# EAGLE board JD_Badge_V1.0 (EAGLE 9.1.3)
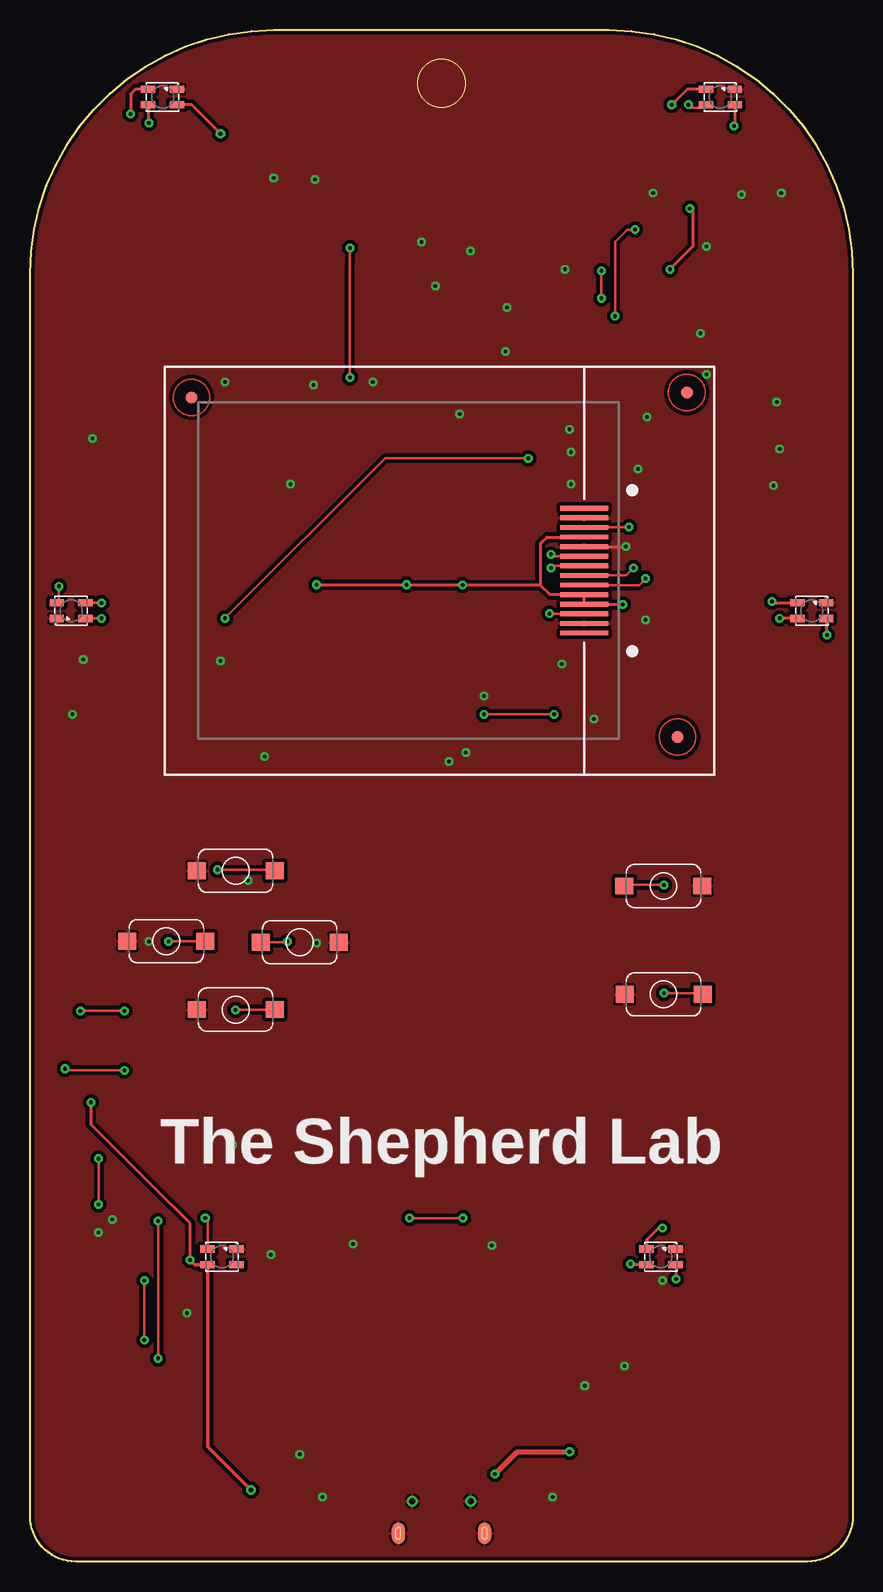
[diagram p0: board, top side]
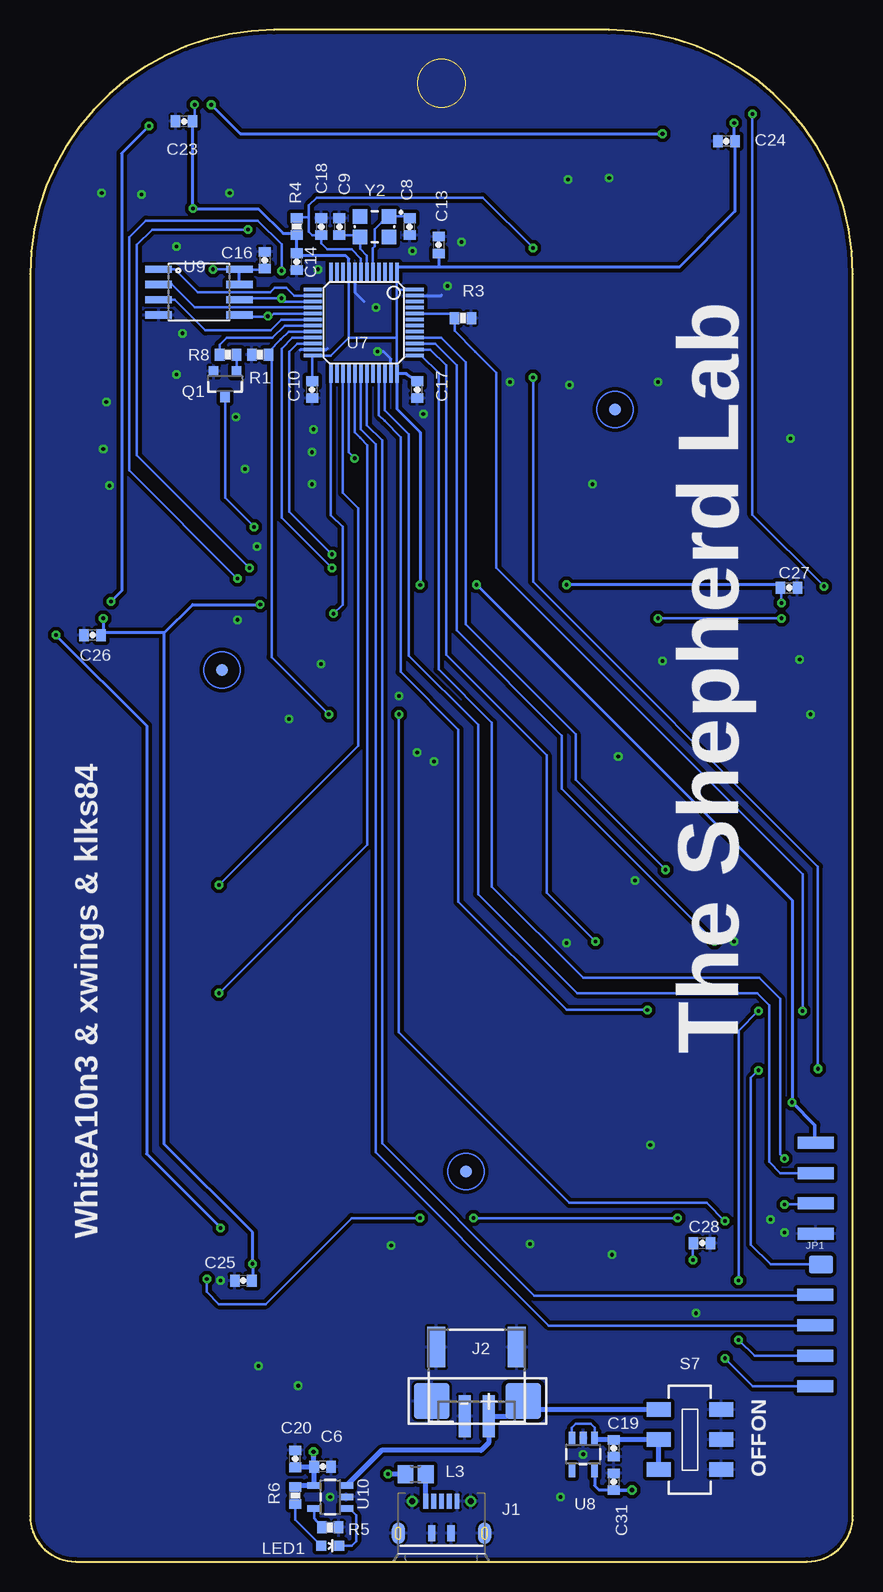
[diagram p1: board, bottom side, seen from below]

Size 68.58 x 127.64 mm. Coordinates in mm from the lower left corner, seen from the top.
Outline: 68.58,107.31 68.58,3.81 arc-90 64.77,0 3.81,0 arc-90 0,3.81 0,107.31 arc-90 20.32,127.64 48.26,127.64 arc-90 68.58,107.31
Copper layers (1*16): Top 0.035mm / dielectric 1.5mm / Bottom 0.035mm
Design rules "yun": minimum track width 6mil, minimum drill 12mil, track to track 6mil, track to pad 6mil, pad to pad 6mil, via to via 6mil, smd to smd 6mil, copper to edge 10mil, drill to drill 6mil, minimum pad ring 8mil, minimum via ring 8mil, stop-mask expansion 4mil, vias tented up to drill 20mil, thermal gap 8mil
Net classes: 0 default: width 0.203 mm, clearance 0.203 mm; 1 3.3V: width 0.254 mm
Milling: area 32.3,121.2 to 36.3,125.2

## Footprints (pad centres in the part's own frame; a part is rotated, then mirrored left to right if it is on the bottom)
BATTERY-LIPO2 = smd 3 x 3: + -3.81,0; - 3.81,0
0603-CAP = smd 0.8 x 1: 1 -0.7,0; 2 0.7,0
RGB_2427 = smd 1.2 x 0.6: 1 1.2,-0.65; 2 1.2,0.65; 3 -1.2,0.65; 4 -1.2,-0.65
USB-MICRO-4 = smd 0.4 x 1.25: DM- 0.65,-1.835; DP+ 0,-1.835; GND -1.3,-1.835; ID -0.65,-1.835; VBUS 1.3,-1.835 | smd 0.6 x 1.35: MT1 0.8,0.815; MT2 -0.8,0.815 | smd 1.1 x 1.8: MT5 3.6,0.815; MT6 -3.6,0.815 | smd 1.1 x 1.8 bottom: MT7 -3.6,0.815; MT8 3.6,0.815 | drill 0.5: MT9 -2.425,-1.86; MT10 2.425,-1.86
PH2.0_SMD_2 = smd 1 x 3.5: 1 -1,-4; 2 1,-4 | smd 1.5 x 3.4: G1 -3.35,1.75; G2 3.35,1.75
1X01_SMD_2X1.5 = smd 2 x 1.5: P$1 0,0
1X04_TEST_2 = smd 1 x 3: 1 -3.81,-0.08; 2 -1.27,-0.08; 3 1.27,-0.08; 4 3.81,-0.08
FB805 = smd 1.3 x 1.5: 1 -0.85,0; 2 0.85,0
LED-0603 = smd 0.8 x 0.8: A 0,-0.75; C 0,0.75
SOT23-3 = smd 0.8 x 0.9: 1 -0.95,-1; 2 0.95,-1; 3 0,1.1
0603-RES = smd 0.8 x 1: 1 -0.7,0; 2 0.7,0
BUTTON_TSSURX = smd 1.5 x 1.4: P$1 -3.25,0; P$2 3.25,0
MSS22D18 = smd 1.2 x 2: 1 -2.5,2.6; 2 0,2.6; 3 2.5,2.6; 4 -2.5,-2.6; 5 0,-2.6; 6 2.5,-2.6
FIDUCIA-MOUNT = smd 1.016 x 1.016: P$1 0,0
TQFP48 = smd 0.3 x 1.5: 1 -2.75,-4.25; 2 -2.25,-4.25; 3 -1.75,-4.25; 4 -1.25,-4.25; 5 -0.75,-4.25; 6 -0.25,-4.25; 7 0.25,-4.25; 8 0.75,-4.25; 9 1.25,-4.25; 10 1.75,-4.25; 11 2.25,-4.25; 12 2.75,-4.25; 25 2.75,4.25; 26 2.25,4.25; 27 1.75,4.25; 28 1.25,4.25; 29 0.75,4.25; 30 0.25,4.25; 31 -0.25,4.25; 32 -0.75,4.25; 33 -1.25,4.25; 34 -1.75,4.25; 35 -2.25,4.25; 36 -2.75,4.25 | smd 1.5 x 0.3: 13 4.25,-2.75; 14 4.25,-2.25; 15 4.25,-1.75; 16 4.25,-1.25; 17 4.25,-0.75; 18 4.25,-0.25; 19 4.25,0.25; 20 4.25,0.75; 21 4.25,1.25; 22 4.25,1.75; 23 4.25,2.25; 24 4.25,2.75; 37 -4.25,2.75; 38 -4.25,2.25; 39 -4.25,1.75; 40 -4.25,1.25; 41 -4.25,0.75; 42 -4.25,0.25; 43 -4.25,-0.25; 44 -4.25,-0.75; 45 -4.25,-1.25; 46 -4.25,-1.75; 47 -4.25,-2.25; 48 -4.25,-2.75
SOT23-5 = smd 1.1 x 0.55: 1 -1.35,0.95; 2 -1.35,0; 3 -1.35,-0.95; 4 1.35,-0.95; 5 1.35,0.95
SO08-EIAJ = smd 0.61 x 2.21: 1 -1.905,-3.378; 2 -0.635,-3.378; 3 0.635,-3.378; 4 1.905,-3.378; 5 1.905,3.353; 6 0.635,3.353; 7 -0.635,3.353; 8 -1.905,3.353
TFT_1.8_SMD = smd 0.4 x 4: 1 5.2,-14.63; 2 4.4,-14.63; 3 3.6,-14.63; 4 2.8,-14.63; 5 2,-14.63; 6 1.2,-14.63; 7 0.4,-14.63; 8 -0.4,-14.63; 9 -1.2,-14.63; 10 -2,-14.63; 11 -2.8,-14.63; 12 -3.6,-14.63; 13 -4.4,-14.63; 14 -5.2,-14.63
CRYSTAL-SMD-3225 = smd 1.2 x 1.2: 1 -1.2,-0.85; 2 1.2,-0.85; 3 1.2,0.85; 4 -1.2,0.85

## Placement (x,y rotation side)
BAT1  [BATTERY-LIPO2]  31.29,13.38 180 bottom
C6  1uF  [0603-CAP]  44.2,7.92 180 bottom
C8  22pF  [0603-CAP]  36.95,111.25 90 bottom
C9  22pF  [0603-CAP]  42.79,111.25 270 bottom
C10  1uF  [0603-CAP]  45.08,97.66 90 bottom
C13  0.1uF  [0603-CAP]  34.54,109.73 270 bottom
C14  0.1uF  [0603-CAP]  46.35,108.33 90 bottom
C16  0.1uF  [0603-CAP]  49.02,108.45 270 bottom
C17  0.1uF  [0603-CAP]  36.31,97.66 90 bottom
C18  0.1uF  [0603-CAP]  44.32,111.25 270 bottom
C19  1uF  [0603-CAP]  19.94,9.45 270 bottom
C20  0.1uF  [0603-CAP]  46.48,8.56 90 bottom
C23  0.1uF  [0603-CAP]  55.75,120.01 180 bottom
C24  0.1uF  [0603-CAP]  10.54,118.36 180 bottom
C25  0.1uF  [0603-CAP]  50.8,23.42 180 bottom
C26  0.1uF  [0603-CAP]  63.37,77.21 180 bottom
C27  0.1uF  [0603-CAP]  5.33,81.15 0 bottom
C28  0.1uF  [0603-CAP]  12.57,26.54 0 bottom
C31  0.1uF  [0603-CAP]  19.94,6.66 270 bottom
D1  XT1511-2427  [RGB_2427]  11.05,122.05 0 top
D2  XT1511-2427  [RGB_2427]  57.53,122.05 0 top
D3  XT1511-2427  [RGB_2427]  65.15,79.25 0 top
D4  XT1511-2427  [RGB_2427]  52.58,25.4 0 top
D5  XT1511-2427  [RGB_2427]  16,25.4 0 top
D6  XT1511-2427  [RGB_2427]  3.43,79.25 180 top
J1  USB_5_MICRO_4  [USB-MICRO-4]  34.29,3.18 180 bottom
J2  M02_G_PH2.0  [PH2.0_SMD_2]  31.37,16.13 0 bottom
JP1  M01_2X1.5MM  [1X01_SMD_2X1.5]  2.67,24.77 0 bottom
JP2  [1X04_TEST_2]  3.05,18.41 270 bottom
JP3  [1X04_TEST_2]  3.18,31.11 90 bottom
L3  1A  [FB805]  36.45,7.29 0 bottom
LED1  [LED-0603]  43.56,1.32 270 bottom
Q1  S8050  [SOT23-3]  52.32,98.18 180 bottom
R1  10k  [0603-RES]  49.4,100.58 180 bottom
R3  10k  [0603-RES]  32.51,103.63 180 bottom
R4  10k  [0603-RES]  46.35,111.25 270 bottom
R5  1.5k  [0603-RES]  43.56,2.85 180 bottom
R6  1k  [0603-RES]  46.48,5.51 90 bottom
R8  1k  [0603-RES]  52.07,100.58 180 bottom
S2  SWITCH_2_T  [BUTTON_TSSURX]  52.79,56.3 180 top
S3  SWITCH_2_T  [BUTTON_TSSURX]  22.47,51.61 180 top
S5  SWITCH_2_T  [BUTTON_TSSURX]  52.79,47.27 0 top
S6  SWITCH_2_T  [BUTTON_TSSURX]  11.36,51.7 0 top
S7  SWITCH-DPDT  [MSS22D18]  13.59,10.16 90 bottom
S8  SWITCH_2_T  [BUTTON_TSSURX]  17.13,57.57 0 top
S9  SWITCH_2_T  [BUTTON_TSSURX]  17.13,46 0 top
U1  FIDUCIALMOUNT  [FIDUCIA-MOUNT]  52.58,74.3 0 bottom
U2  FIDUCIALMOUNT  [FIDUCIA-MOUNT]  32.26,32.51 0 bottom
U3  FIDUCIALMOUNT  [FIDUCIA-MOUNT]  19.81,96.01 0 bottom
U5  FIDUCIALMOUNT  [FIDUCIA-MOUNT]  53.97,68.7 0 top
U6  FIDUCIALMOUNT  [FIDUCIA-MOUNT]  13.45,97.03 0 top
U7  STM32F103C8T6  [TQFP48]  40.76,103.25 180 bottom
U8  ME6212  [SOT23-5]  22.48,8.94 270 bottom
U9  W25Q32  [SO08-EIAJ]  54.48,105.79 270 bottom
U10  ME4074  [SOT23-5]  43.56,5.38 180 bottom
U11  TFT_1.8_SMD  [TFT_1.8_SMD]  31.56,82.58 90 top
U12  FIDUCIALMOUNT  [FIDUCIA-MOUNT]  54.73,97.41 0 top
U13  LOGO_HACKNOWN_14.4_13.2_Z  [LOGO_HACKNOWN_14.4_13.2_Z]  63.63,3.05 0 bottom
Y2  8MHz  [CRYSTAL-SMD-3225]  39.87,111.25 180 bottom

## Library data of the parts
BAT1 C6 C8-C10 C13 C14 C16-C20 C23-C28 C31 D1-D6 J1 J2 JP1-JP3 L3 LED1 R1 R3-R6 R8 S2 S3 S5 S6 S8 S9 U1-U3 U5-U13 Y2 = 2SparkFun
Q1 = 1SparkFun
S7 = 0SparkFun

## Nets
3.3V: C10.2 C13.2 C14.2 C16.2 C17.2 C23.1 C24.1 C25.1 C26.1 C27.1 C28.1 C31.2 D1.4 D2.4 D3.4 D4.4 D5.4 D6.4 JP3.4 R4.2 U7.1 U7.9 U7.24 U7.36 U7.48 U8.5 U9.7 U9.8 U11.4 U11.10 U11.11
5V: C6.2 C20.1 L3.1 R6.2 U10.4
11: U7.46
111: U7.13
113: U7.41
GND: BAT1.- C6.1 C8.1 C9.1 C10.1 C13.1 C14.1 C16.1 C17.1 C18.1 C19.2 C20.2 C23.2 C24.2 C25.2 C26.2 C27.2 C28.2 C31.1 D1.2 D2.2 D3.2 D4.2 D5.2 D6.2 J1.GND J1.MT1 J1.MT2 J1.MT5 J1.MT6 J1.MT7 J1.MT8 J1.MT9 J1.MT10 J2.1 J2.G1 J2.G2 JP3.1 Q1.2 R1.2 R3.1 R5.1 S2.P$1 S3.P$1 S5.P$1 S6.P$1 S7.4 S7.5 S7.6 S8.P$1 S9.P$1 U7.8 U7.23 U7.35 U7.47 U8.2 U9.4 U10.2 U11.2 U11.5 U11.13
I2C1_SCL: U7.42
I2C1_SDA: U7.43
KEY_A: U7.26
KEY_B: U7.32
KEY_C: S5.P$2 U7.29
KEY_D: S2.P$2 U7.27
KEY_DOWN: S9.P$2 U7.33
KEY_ESC: U7.12
KEY_LEFT: S6.P$2 U7.39
KEY_OK: U7.10
KEY_RIGHT: S3.P$2 U7.38
KEY_UP: S8.P$2 U7.40
LCD_A0: U7.21 U11.7
LCD_CS: U7.25 U11.12
LCD_RES: U7.22 U11.6
MISO: U7.16 U9.2
MOSI: U7.17 U9.5 U11.8
MOSI2: D6.3 U7.28
N$1: D3.1 D4.3
N$2: C8.2 U7.5 Y2.1
N$4: C9.2 U7.6 Y2.3
N$6: D4.1 D5.3
N$7: R5.2 U10.5
N$8: D5.1
N$9: Q1.3 U11.3
N$10: LED1.A R6.1
N$11: LED1.C U10.1
N$12: J1.VBUS L3.2
N$13: BAT1.+ J2.2 S7.3 U10.3
N$14: D1.3 D6.1
N$31: Q1.1 R8.1
N$53: D2.1 D3.3
N$65: D1.1 D2.3
RF: U7.45
RF_CS_2: U7.11
SCK: U7.15 U9.6 U11.9
STM32_BOOT0: JP2.3 R3.2 U7.44
STM32_BOOT1: JP2.4 R1.1 U7.20
STM32_RST: C18.2 JP1.P$1 R4.1 U7.7
STM32_RX: JP2.1 U7.31
STM32_TX: JP2.2 U7.30
SWCLK: JP3.2 U7.37
SWDIO: JP3.3 U7.34
TFT_BK: R8.2 U7.19
VBAT: C19.1 S7.1 S7.2 U8.1 U8.3
W25Q_CS: U7.14 U9.1
W25Q_WP: U7.18 U9.3

## Tracks (layer width: path | path; a pad name or v marks a point on that pad's centre or on a via)
3.3V  (via drill 0.3, 0.35)
  Top 0.203: D6.4 5.95,79.9 v5.96,79.88 | v54.86,121.41 55.11,121.16 56.09,121.16 D2.4 | 9.9,121.34 D1.4
  Top 0.254: 42.54,81.38 v36.06,81.38 31.34,81.38 v31.36,81.41 v23.87,81.41 | D3.4 62.49,78.6 v62.48,78.61 | v49.4,79.75 46.22,79.75 U11.11 U11.10 43.34,80.58 42.54,81.38 | v53.33,107.69 55.24,109.6 55.24,112.52 v54.98,112.77 | D4.4 50.1,24.75 v50.04,24.82 | v13.34,25.15 13.34,28.07 13.34,28.19 10.54,30.99 5.08,36.45 v5.08,38.28 | U11.4 43.08,85.38 42.54,84.83 42.54,81.38 | v9.9,119.89 9.9,121.34 9.9,121.35 D1.4
  Top 0.305: v18.41,5.97 15.05,9.34 | 15.05,9.34 14.99,9.4 | 15.05,9.34 14.8,9.58 D5.4 13.73,24.75 v13.34,25.15
  Bottom 0.203: 38.01,98.91 U7.36 38.01,101.98 | 38.01,101.98 38.01,106.04 | 38.01,106.04 38.01,107.31 U7.1 | U7.48 37.97,106 38.01,106.04 | 50.92,107.57 51,107.57 51.09,107.66 | v53.33,107.69 U9.8 51.09,107.66 | U7.9 42.01,102 | 42.01,102 43.51,100.5 U7.24 45.08,100.43 C10.2 | 38.01,101.98 42.01,101.98 42.01,102 | v5.96,79.88 5.96,81.09 C27.1 | v54.86,121.41 54.86,120.2 C23.1 | v13.34,25.15 13.34,26.48 C28.1 | 18.43,5.96 v18.41,5.97 | C16.2 49.11,107.66 51.09,107.66
  Bottom 0.254: U8.5 21.53,6.34 21.14,5.96 C31.2 | v31.36,81.41 27.49,77.54 5.08,55.12 v5.08,38.28 | C17.2 37.21,99 U7.36 38.01,96.05 36.06,94.11 v36.06,81.38 | U7.9 42.01,108.56 42.28,108.84 46.16,108.84 C14.2 | C14.2 46.67,109.03 | 54.8,112.71 54.92,112.71 v54.98,112.77 | 38.01,107.31 38.01,107.88 35.55,107.88 34.92,107.88 34.54,107.88 | C13.2 34.54,107.88 | v23.87,81.41 6.28,81.41 C27.1 | v62.48,78.61 62.48,77.4 C26.1 62.48,77.39 57.4,77.39 | C25.1 50.04,23.48 v50.04,24.82 50.04,27.44 57.4,34.8 57.4,77.39 | U9.7 U9.8 | v49.4,79.75 55.04,79.75 57.4,77.39 | C14.2 R4.2 46.48,110.68 47.49,110.68 49.52,112.71 54.8,112.71 | JP3.4 3.09,34.97 3.18,35.05 | v9.9,119.89 9.9,118.42 C24.1 9.84,112.51 14.47,107.88 34.54,107.88 | C23.1 55.05,112.96 54.8,112.71
  Bottom 0.305: 3.18,35.05 3.18,36.37 v5.08,38.28 | C31.2 18.43,5.96
5V  (via drill 0.3, 0.35)
  Top 0.406: v38.73,7.29 40.59,9.14 v44.96,9.14
  Bottom 0.305: 46.36,6.33 R6.2
  Bottom 0.406: L3.1 v38.73,7.29 | 46.36,6.33 U10.4 44.9,6.35 C6.2 | v44.96,9.14 44.96,7.99 C6.2 | C6.2 44.93,7.96 | C6.2 44.96,7.86 C20.1
GND  (via drill 0.3)
  Top 0.254: U11.5 v49.65,84.58
  Bottom 0.254: U7.47 34.32,105.5 34.28,105.53 | U7.8 41.51,105.78 40.76,105.03 | U7.35 38.51,100.24 39.11,100.84 v39.62,100.84 | 43.81,101.09 43.9,101 U7.23 46.06,101 46.09,100.96
  other vias: 22.48,8.94 43.56,5.38 46.23,14.66 44.95,94.36 35.81,95.63 45.08,92.45 39.74,104.52 56.38,109.6 44.57,107.69 52.7,23.42 13.08,20.7 6.86,28.5 16.89,34.72 19.56,67.11 38.48,26.34 49.53,16.31 33.77,106.3 55.87,102.36 56.38,98.93 51.43,95.38 62.22,96.64 62.48,92.71 61.97,89.66 32.63,109.98 36.7,109.22 20.31,115.31 23.74,115.19 23.61,98.04 16.25,98.3 28.57,98.3 5.2,93.6 15.87,75.06 4.44,75.18 21.71,89.79 44.32,74.8 50.67,91.06 45.08,89.79 51.3,78.48 46.98,70.23 36.31,67.44 34.92,66.67 37.84,72.13 3.55,70.61 24.38,5.38 62.6,114.04 59.3,113.92 51.94,114.04 5.71,27.43 26.92,26.47 20.07,25.58 18.16,56.77 23.88,51.56 9.91,51.69
  pour Top (isolate 0.305, rank 2): -2.01,-1.15 70.83,-1.15 70.83,127.79 -2.01,127.79
  pour Bottom (isolate 0.305, rank 2): -2.04,-1.15 70.96,-1.15 70.96,127.79 -2.13,127.79 -2.04,75.06
KEY_C  (via drill 0.3)
  Top 0.203: v52.83,47.37 55.95,47.37 S5.P$2
  Bottom 0.203: v52.83,47.37 40.45,59.74 40.45,93.05 41.07,93.66 41.51,94.1 U7.29
KEY_D  (via drill 0.3)
  Top 0.203: v52.83,56.39 49.62,56.39 S2.P$2
  Bottom 0.203: U7.27 42.51,89.06 41.24,87.8 41.24,67.97 v52.83,56.39
KEY_DOWN  (via drill 0.3)
  Top 0.203: S9.P$2 17.17,46 v17.14,45.97
  Bottom 0.203: 17.37,45.97 v17.14,45.97 23.87,45.97 32.89,54.99 32.89,69.34 37.69,74.14 37.69,93.72 39.04,95.07 39.51,95.54 U7.33
KEY_LEFT  (via drill 0.3)
  Top 0.203: S6.P$2 11.56,51.7 v11.55,51.69
  Bottom 0.203: U7.39 34.82,101.5 33.01,99.69 33.01,77.59 24.25,68.83 24.25,64.39 v11.55,51.69
KEY_RIGHT  (via drill 0.3)
  Top 0.203: S3.P$2 21.46,51.61 v21.46,51.69
  Bottom 0.203: U7.38 35.21,101 33.9,99.69 33.9,75.56 25.52,67.18 25.52,55.75 v21.46,51.69
KEY_UP  (via drill 0.3)
  Top 0.203: v15.61,57.66 20.3,57.66 S8.P$2
  Bottom 0.203: U7.40 34.3,102 32.25,99.95 32.25,78.1 23.11,68.96 23.11,65.15 v15.61,57.66
LCD_A0  (via drill 0.3)
  Top 0.203: U11.7 43.6,82.98 v43.43,82.8
  Bottom 0.203: U7.21 46.71,102 47.62,101.09 47.62,86.99 v43.43,82.8
LCD_CS  (via drill 0.3)
  Top 0.203: v43.3,78.99 45.05,78.99 45.55,79.06 45.81,78.98 U11.12
  Bottom 0.203: U7.25 43.51,87.2 42.54,86.23 42.54,79.75 v43.3,78.99
LCD_RES  (via drill 0.3)
  Top 0.203: U11.6 43.59,83.78 v43.43,83.94
  Bottom 0.203: U7.22 46.32,101.5 46.98,100.84 46.98,87.5 v43.43,83.94
MISO
  Bottom 0.203: U7.16 45.05,104.54 54.86,104.54 56.76,106.45 57.83,106.45 U9.2
MOSI  (via drill 0.3)
  Top 0.203: v48.76,103.78 48.76,109.98 49.78,111 v50.41,111 | U11.8 49.67,82.18 v50.29,82.8
  Bottom 0.203: U7.17 48.27,104 48.48,103.78 v48.76,103.78 48.76,103.76 51,103.76 U9.5 | v50.29,82.8 59.68,92.19 59.68,109.73 58.41,111 v50.41,111
MOSI2  (via drill 0.3)
  Top 0.203: v41.52,91.95 29.58,91.95 v16.25,78.61 | 4.82,78.61 v5.96,78.61
  Top 0.254: D6.3 4.64,78.61 4.82,78.61
  Bottom 0.203: U7.28 42.01,92.43 v41.52,91.95 | v16.25,78.61 v5.96,78.61
N$1  (via drill 0.3)
  Top 0.254: v66.41,77.21 66.35,77.21 66.35,77.23 D3.1 | v52.7,27.81 52.38,27.81 51.38,26.81 D4.3
  Bottom 0.254: v66.41,77.21 58.87,69.67 58.87,33.98 v52.7,27.81
N$2
  Bottom 0.203: C8.2 37.1,112.1 Y2.1 38.82,112.1 39.87,111.05 39.87,109.6 40.01,109.46 U7.5
N$4
  Bottom 0.203: C9.2 41.22,110.55 Y2.3 41.07,109.4 40.51,108.84 U7.6
N$6  (via drill 0.3)
  Top 0.203: D4.1 53.85,24.98 v53.85,23.55 | D5.3 14.8,28.43 v14.61,28.63 | v31.62,28.63 v36.07,28.63
  Bottom 0.203: v14.61,28.63 v31.62,28.63 | v36.07,28.63 41.78,28.63 48.95,21.46 52.83,21.46 53.85,22.48 v53.85,23.55
N$7
  Bottom 0.203: U10.5 44.91,3.61 R5.2
N$9  (via drill 0.3)
  Top 0.203: U11.3 49.85,86.18 v49.9,86.23
  Bottom 0.203: v49.9,86.23 52.32,88.65 Q1.3
N$10
  Bottom 0.203: R6.1 46.48,3.49 LED1.A
N$11
  Bottom 0.203: U10.1 41.98,4.43 41.4,3.86 41.4,1.7 41.78,1.32 LED1.C
N$12
  Bottom 0.406: J1.VBUS L3.2
N$13
  Bottom 0.406: U10.3 39.27,9.27 30.99,9.27 30.37,9.89 J2.2 28.85,12.13 27.6,13.38 26.88,12.66 S7.3
  Bottom 0.508: 27.6,13.38 BAT1.+
N$14  (via drill 0.3)
  Top 0.203: D6.1 2.41,80.08 v2.41,81.28
  Top 0.254: D1.3 8.78,122.7 8.38,122.3 v8.38,120.66 v8.38,120.65
  Bottom 0.203: v8.38,120.65 8.38,87.25 v2.41,81.28
N$31
  Bottom 0.203: Q1.1 R8.1
N$53  (via drill 0.3)
  Top 0.254: D2.1 58.73,119.69 v58.67,119.63 | v61.84,80.01 61.95,79.9 D3.3
  Bottom 0.254: v58.67,119.63 60.95,117.35 60.95,80.9 v61.84,80.01
N$65  (via drill 0.35)
  Top 0.254: D2.3 54.75,122.7 v53.47,121.41 | v15.88,119 13.48,121.4 D1.1
  Bottom 0.254: v53.47,121.41 51.05,119 v15.88,119
SCK  (via drill 0.3)
  Top 0.203: v47.62,105.28 v47.62,107.57 | U11.9 50.77,81.38 v51.3,81.91
  Bottom 0.203: U7.15 47.46,105 47.74,105.28 v47.62,105.28 51,105.28 U9.6 | v51.3,81.91 60.32,90.93 60.32,110.36 58.92,111.76 49.58,111.76 47.62,109.79 v47.62,107.57
STM32_BOOT0  (via drill 0.3)
  Top 0.203: v9.52,18.47 v9.52,23.42 | v7.87,45.9 v4.19,45.9
  Bottom 0.203: U7.44 33.57,104 R3.2 33.2,102.55 31.49,100.84 29.71,99.06 29.71,82.8 4.19,57.28 v4.19,45.9 | v9.52,23.42 9.52,44.25 v7.87,45.9 | v9.52,18.47 8.2,17.14 JP2.3
STM32_BOOT1  (via drill 0.3)
  Top 0.203: v43.68,70.61 v37.84,70.61 | v10.67,28.37 v10.67,16.94
  Bottom 0.203: U7.20 47.03,102.5 47.68,101.85 48.7,100.84 R1.1 48.44,100.33 48.44,75.37 v43.68,70.61 | v37.84,70.61 37.84,44.11 23.62,29.9 12.19,29.9 v10.67,28.37 | v10.67,16.94 8.33,14.61 JP2.4
STM32_RST  (via drill 0.3)
  Top 0.203: v2.92,41.07 2.92,40.95 v7.87,40.95 | v26.66,98.68 26.66,108.2 v26.66,109.47
  Bottom 0.203: U7.7 41.01,108.58 41.78,109.34 43.81,109.34 44.32,109.85 C18.2 45.08,110.55 45.33,110.8 45.33,112.01 | v2.92,41.07 2.92,57.92 26.66,81.66 v26.66,98.68 | v26.66,109.47 30.85,113.66 44.7,113.66 45.33,113.03 45.33,112.01 | R4.1 46.29,112.01 45.33,112.01 | v7.87,40.95 8.51,40.31 8.51,26.42 6.86,24.77 JP1.P$1
STM32_RX
  Bottom 0.203: U7.31 40.51,94.7 39.24,93.43 39.24,34.85 26.54,22.15 3.08,22.15 JP2.1
STM32_TX
  Bottom 0.203: U7.30 41.01,94.37 39.78,93.13 39.78,34.11 25.33,19.67 3.02,19.67 JP2.2
SWCLK  (via drill 0.3)
  Top 0.203: v5.71,33.58 v5.71,29.77
  Bottom 0.203: v5.71,33.58 6.07,33.94 6.07,46.91 7.8,48.64 22.47,48.64 30.09,56.26 30.09,69.92 34.54,74.36 34.54,99.06 35.98,100.5 U7.37 | v5.71,29.77 5.71,29.8 3.14,29.8 JP3.2
SWDIO
  Bottom 0.203: U7.34 39.01,95.94 37,93.93 37,75.49 31.24,69.73 31.24,55.63 22.98,47.37 7.99,47.37 6.98,46.36 6.98,33.33 6.04,32.38 4.36,32.38
  Bottom 0.254: JP3.3 4.36,32.38
TFT_BK
  Bottom 0.203: U7.19 47.36,103 48.38,101.98 52.2,101.98 52.77,101.41 R8.2
VBAT
  Bottom 0.203: U8.1 21.53,11.17 21.84,11.48 23.11,11.48 23.43,11.17 U8.3
  Bottom 0.406: S7.1 S7.2 19.93,10.16 | 19.93,10.16 C19.1 | C19.1 21.39,10.15 U8.1 | C19.1 19.93,10.16
W25Q_CS
  Bottom 0.203: U9.1 56.51,107.69 54.6,105.79 48.57,105.79 48.19,106.17 47.24,106.17 46.57,105.5 U7.14
W25Q_WP
  Bottom 0.203: U7.18 47.62,103.5 48.51,102.61 53.97,102.61 56.51,105.15 U9.3

## Text on the board
tPlace: The Shepherd Lab
bPlace: The Shepherd Lab | WhiteA10n3 & xwings & klks84 | ON | OFF